# EAGLE board Sequencer-Memory-V1.0-1 (EAGLE 7.6.0)
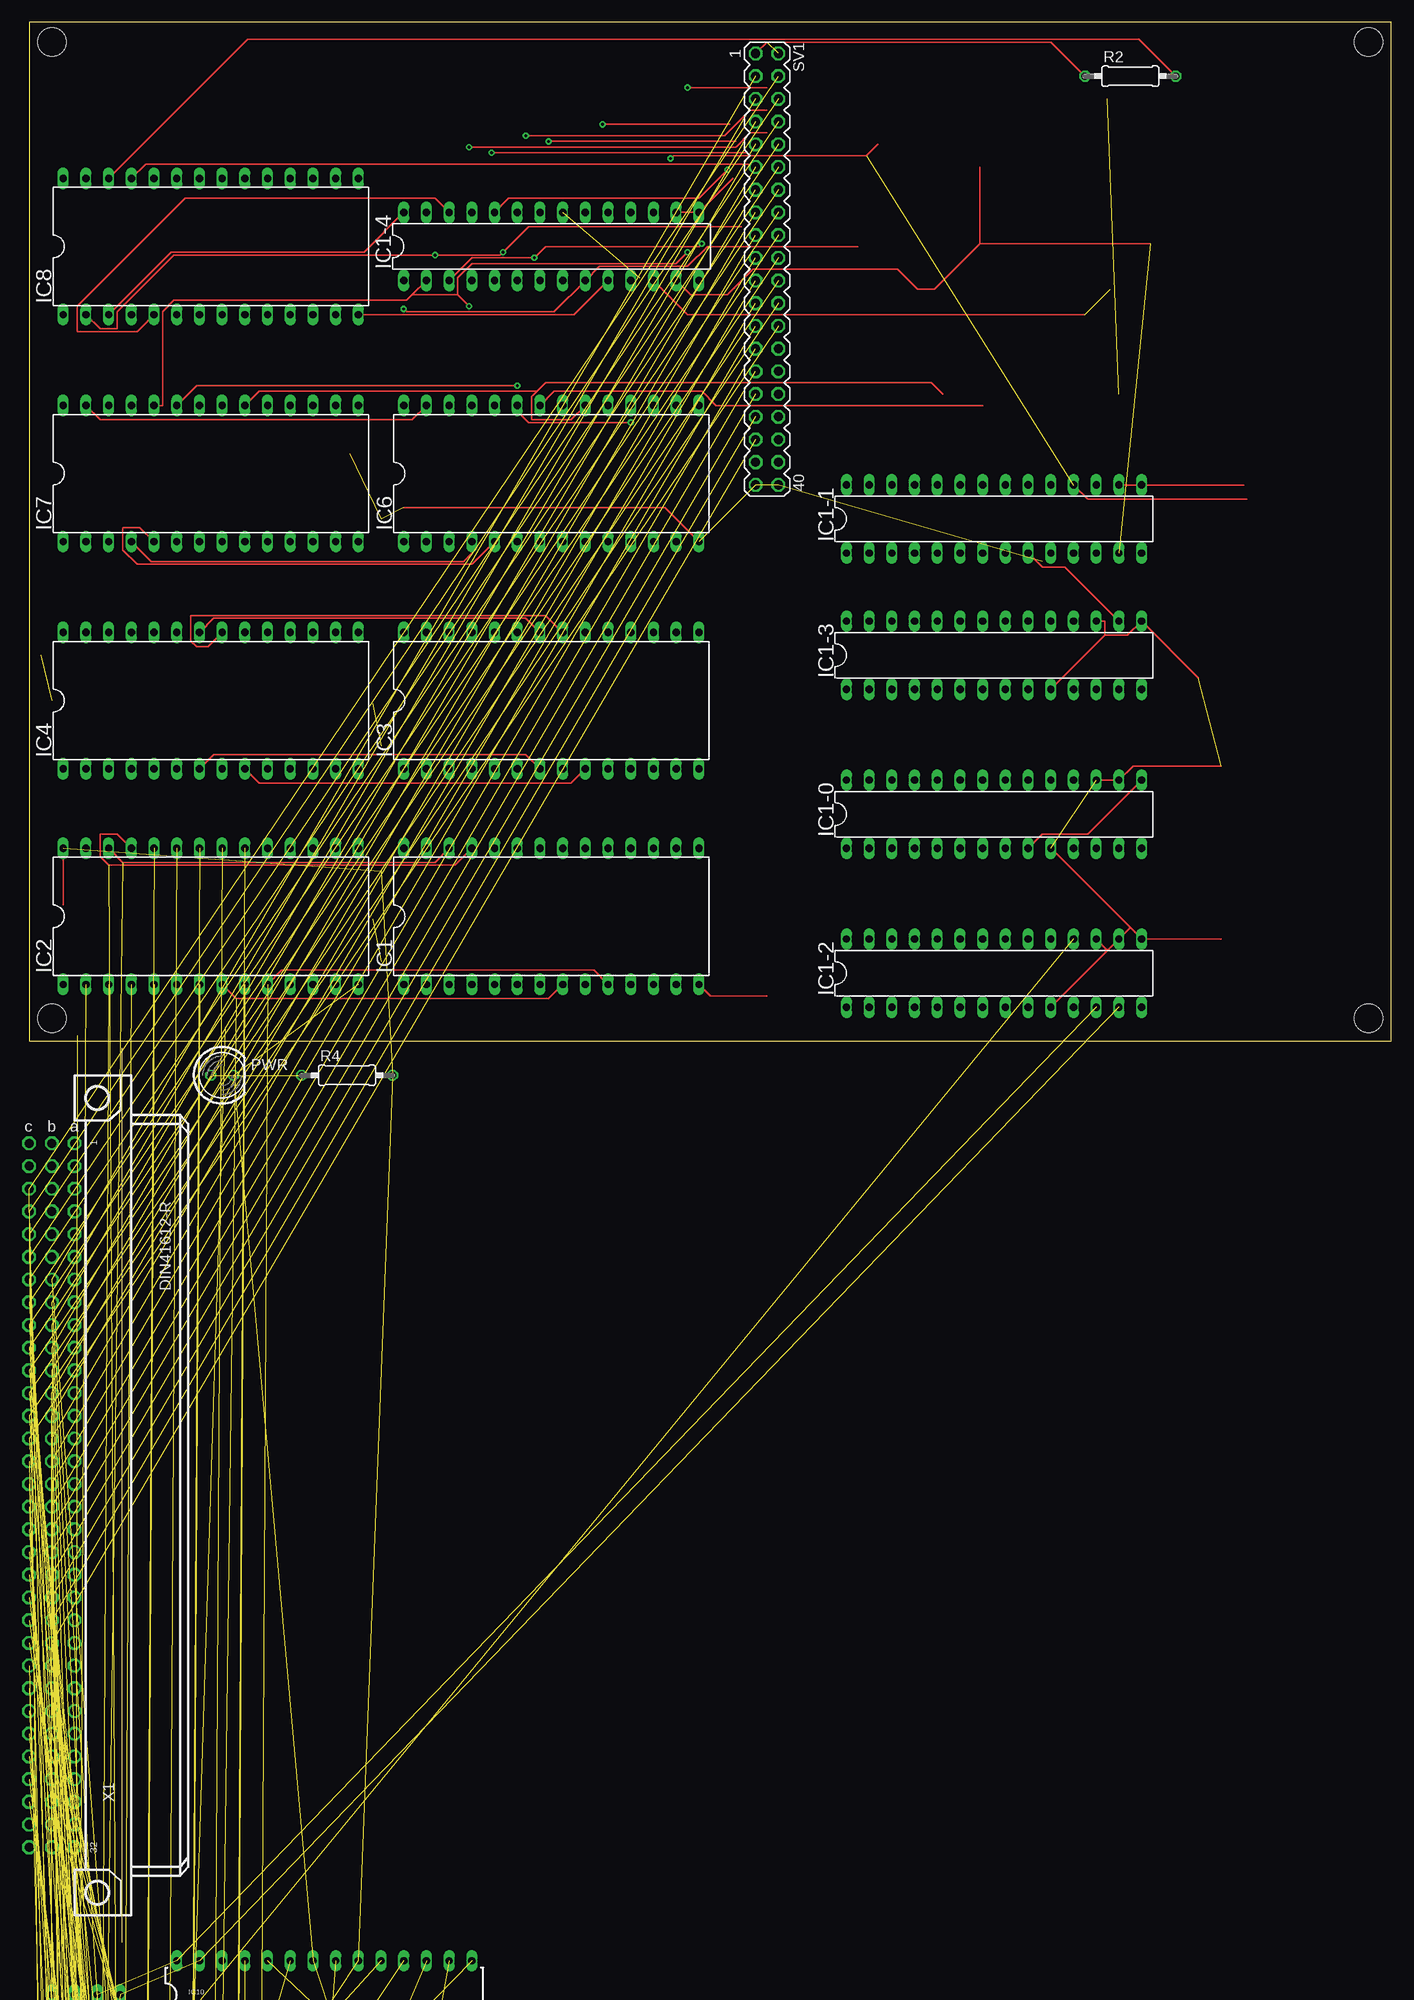
[diagram p0: board, top side]
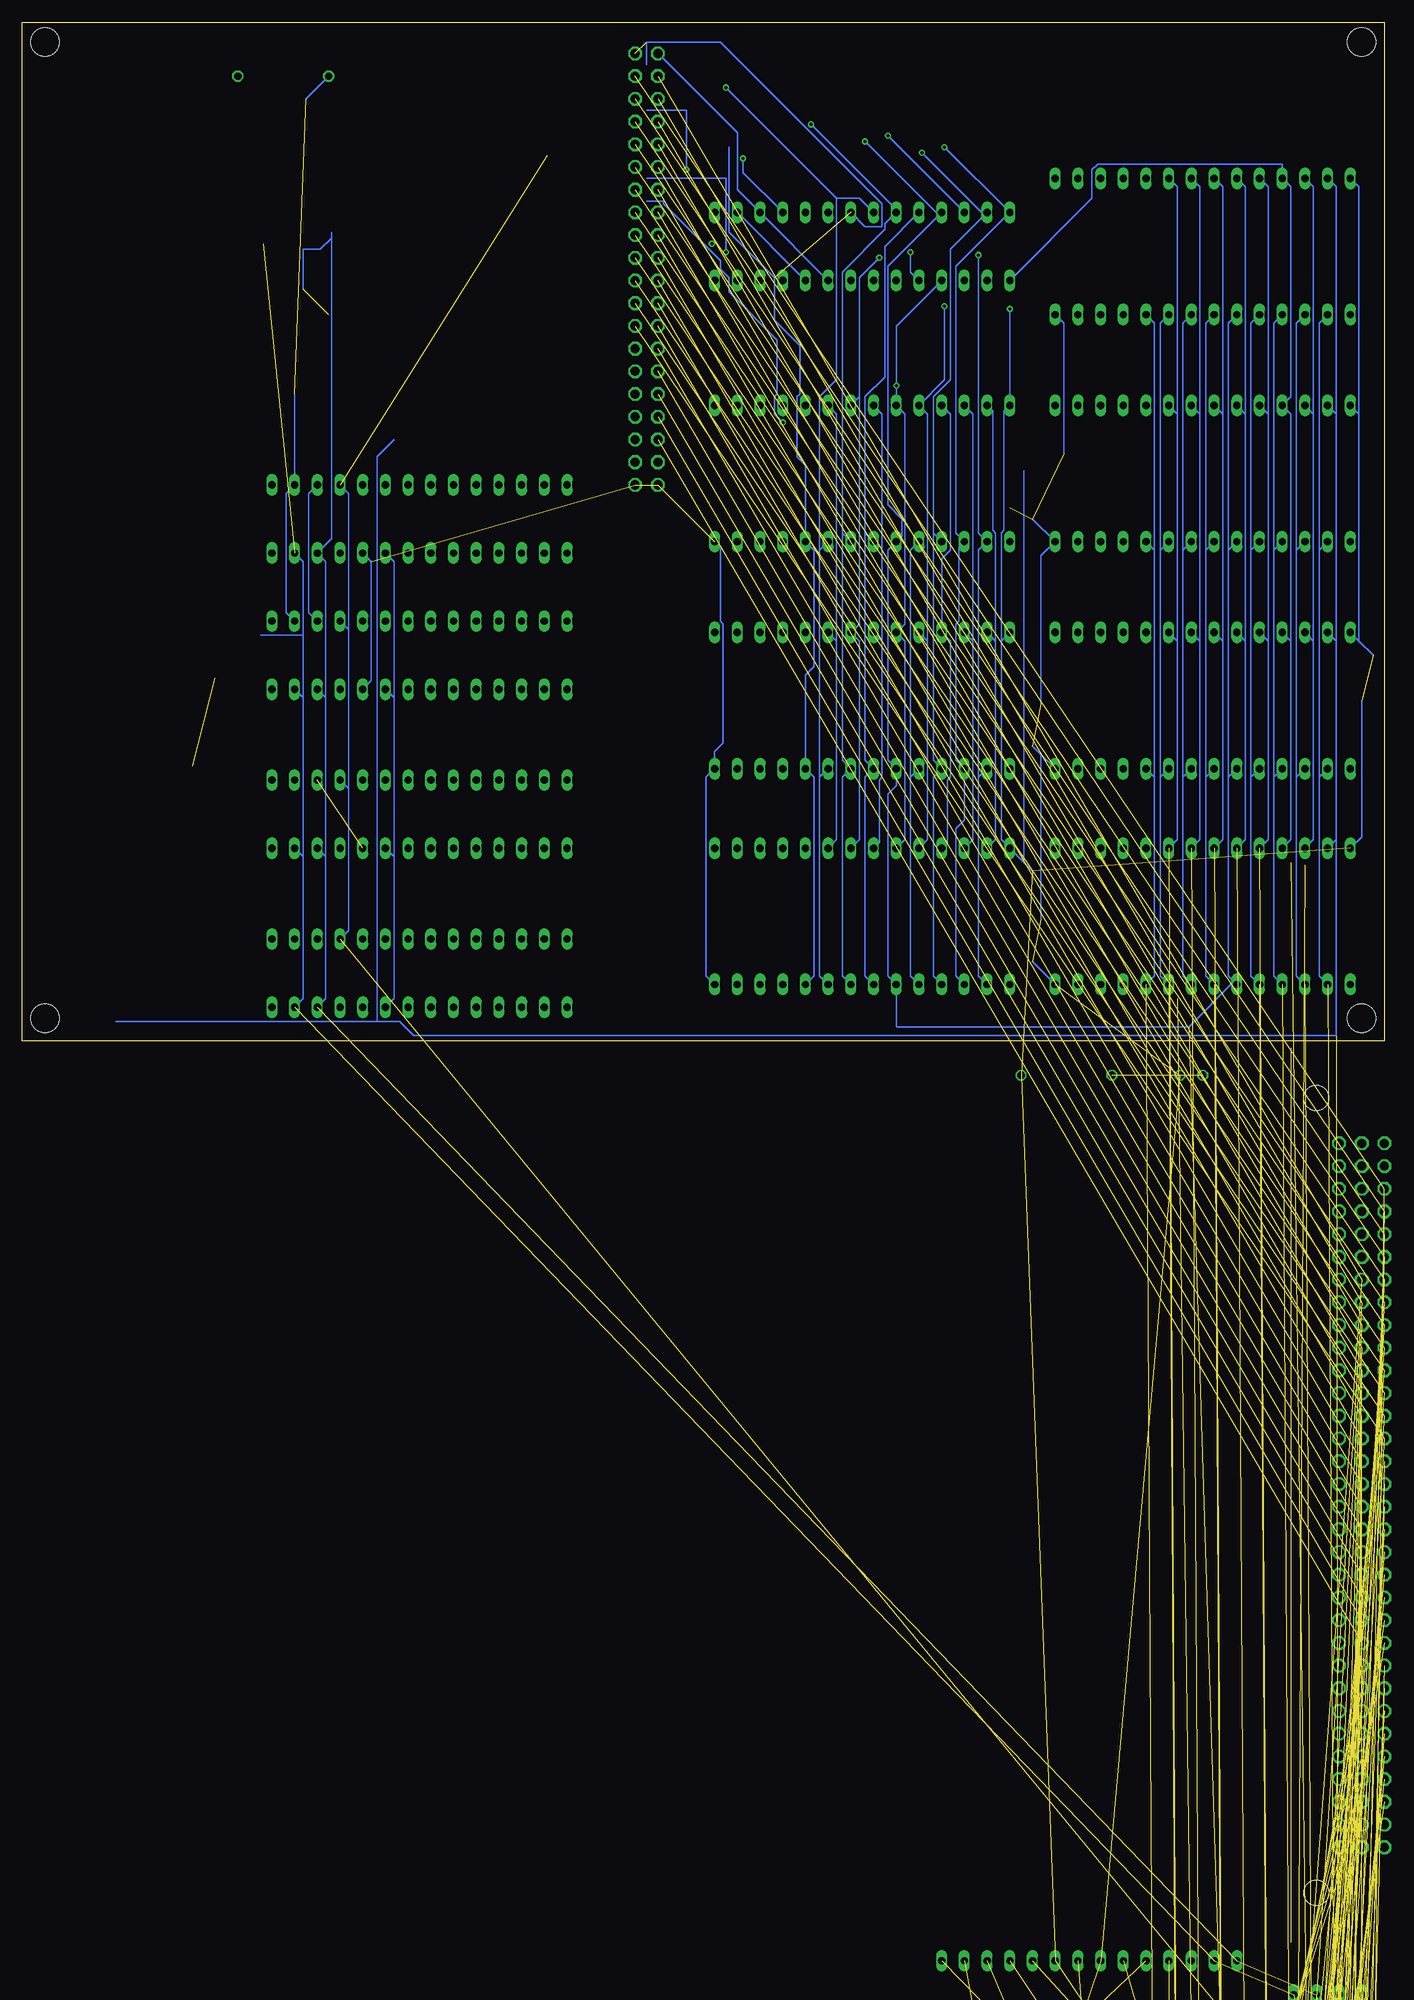
[diagram p1: board, bottom side, seen from below]

Size 152.38 x 113.97 mm. Coordinates in mm from the lower left corner, seen from the top.
Outline: 0,0 152.38,0 152.38,113.97 0,113.97 0,0
Copper layers (1*16): Top 0.0356mm / dielectric 1.5011mm / Bottom 0.0356mm
Design rules "LaenPCBOrder": minimum track width 6mil, minimum drill 13mil, track to track 6mil, track to pad 6mil, pad to pad 6mil, via to via 6mil, smd to smd 6mil, copper to edge 15mil, drill to drill 6mil, minimum pad ring 7mil, minimum via ring 7mil, stop-mask expansion 3mil, vias tented up to drill 0mil, thermal gap 10mil
Holes 3.2 mm at 2.54,2.54 149.86,2.54 149.86,111.76 2.54,111.76

## Footprints (pad centres in the part's own frame; a part is rotated, then mirrored left to right if it is on the bottom)
TACTILE-PTH-SIDEEZ = drill 0.8 pad 1.7: 1 -2.5,0; 2 2.5,0 | drill 1.2 pad 2.2: ANCHOR1 -3.5,2.5; ANCHOR2 3.5,2.5
C025-024X044 = drill 0.813 pad 1.422 octagon: 1 -1.27,0; 2 1.27,0
SW4-6.2X6.2X5.0MM = drill 1.143 pad 1.905 square: 1 -3.25,2.25 | drill 1.143 pad 1.905: 2 -3.25,-2.25; 3 3.25,-2.25; 4 3.25,2.25
JP1 = drill 0.914 long: 1 0,-1.27; 2 0,1.27
DIL28-6 = drill 0.813 long: 1 -16.51,-7.62; 2 -13.97,-7.62; 3 -11.43,-7.62; 4 -8.89,-7.62; 5 -6.35,-7.62; 6 -3.81,-7.62; 7 -1.27,-7.62; 8 1.27,-7.62; 9 3.81,-7.62; 10 6.35,-7.62; 11 8.89,-7.62; 12 11.43,-7.62; 13 13.97,-7.62; 14 16.51,-7.62; 15 16.51,7.62; 16 13.97,7.62; 17 11.43,7.62; 18 8.89,7.62; 19 6.35,7.62; 20 3.81,7.62; 21 1.27,7.62; 22 -1.27,7.62; 23 -3.81,7.62; 24 -6.35,7.62; 25 -8.89,7.62; 26 -11.43,7.62; 27 -13.97,7.62; 28 -16.51,7.62
DIL28-3 = drill 0.813 long: 1 -16.51,-3.81; 2 -13.97,-3.81; 3 -11.43,-3.81; 4 -8.89,-3.81; 5 -6.35,-3.81; 6 -3.81,-3.81; 7 -1.27,-3.81; 8 1.27,-3.81; 9 3.81,-3.81; 10 6.35,-3.81; 11 8.89,-3.81; 12 11.43,-3.81; 13 13.97,-3.81; 14 16.51,-3.81; 15 16.51,3.81; 16 13.97,3.81; 17 11.43,3.81; 18 8.89,3.81; 19 6.35,3.81; 20 3.81,3.81; 21 1.27,3.81; 22 -1.27,3.81; 23 -3.81,3.81; 24 -6.35,3.81; 25 -8.89,3.81; 26 -11.43,3.81; 27 -13.97,3.81; 28 -16.51,3.81
DIL8 = drill 0.813 long: 1 -3.81,-3.81; 2 -1.27,-3.81; 3 1.27,-3.81; 4 3.81,-3.81; 5 3.81,3.81; 6 1.27,3.81; 7 -1.27,3.81; 8 -3.81,3.81
FTDI_DEVICE_SIDE = drill 1 square: P$1 -6.35,0 | drill 1.016 pad 1.778: P$2 -3.81,0; P$3 -1.27,0; P$4 1.27,0; P$5 3.81,0; P$6 6.35,0
1X03 = drill 1.016 long: 1 -2.54,0; 2 0,0; 3 2.54,0
LED5MM = drill 0.813 octagon: A -1.27,0; K 1.27,0
HC49/S = drill 0.813: 1 -2.413,0; 2 2.413,0
0207/10 = drill 0.813 octagon: 1 -5.08,0; 2 5.08,0
0207/10' = drill 0.813 pad 1.676 octagon: 1 -5.08,0; 2 5.08,0
9070-1W = drill 0.813 long: 1 5.08,-2.54; 2 5.08,0; 3 5.08,2.54 | drill 1.118 pad 1.778: B 0,-2.54; B1 0,2.54
MA20-2 = drill 1.016 octagon: 1 -24.13,-1.27; 2 -24.13,1.27; 3 -21.59,-1.27; 4 -21.59,1.27; 5 -19.05,-1.27; 6 -19.05,1.27; 7 -16.51,-1.27; 8 -16.51,1.27; 9 -13.97,-1.27; 10 -13.97,1.27; 11 -11.43,-1.27; 12 -11.43,1.27; 13 -8.89,-1.27; 14 -8.89,1.27; 15 -6.35,-1.27; 16 -6.35,1.27; 17 -3.81,-1.27; 18 -3.81,1.27; 19 -1.27,-1.27; 20 -1.27,1.27; 21 1.27,-1.27; 22 1.27,1.27; 23 3.81,-1.27; 24 3.81,1.27; 25 6.35,-1.27; 26 6.35,1.27; 27 8.89,-1.27; 28 8.89,1.27; 29 11.43,-1.27; 30 11.43,1.27; 31 13.97,-1.27; 32 13.97,1.27; 33 16.51,-1.27; 34 16.51,1.27; 35 19.05,-1.27; 36 19.05,1.27; 37 21.59,-1.27; 38 21.59,1.27; 39 24.13,-1.27; 40 24.13,1.27
FABC96R = drill 1.016 octagon: A1 -2.54,39.37; A2 -2.54,36.83; A3 -2.54,34.29; A4 -2.54,31.75; A5 -2.54,29.21; A6 -2.54,26.67; A7 -2.54,24.13; A8 -2.54,21.59; A9 -2.54,19.05; A10 -2.54,16.51; A11 -2.54,13.97; A12 -2.54,11.43; A13 -2.54,8.89; A14 -2.54,6.35; A15 -2.54,3.81; A16 -2.54,1.27; A17 -2.54,-1.27; A18 -2.54,-3.81; A19 -2.54,-6.35; A20 -2.54,-8.89; A21 -2.54,-11.43; A22 -2.54,-13.97; A23 -2.54,-16.51; A24 -2.54,-19.05; A25 -2.54,-21.59; A26 -2.54,-24.13; A27 -2.54,-26.67; A28 -2.54,-29.21; A29 -2.54,-31.75; A30 -2.54,-34.29; A31 -2.54,-36.83; A32 -2.54,-39.37; B1 -5.08,39.37; B2 -5.08,36.83; B3 -5.08,34.29; B4 -5.08,31.75; B5 -5.08,29.21; B6 -5.08,26.67; B7 -5.08,24.13; B8 -5.08,21.59; B9 -5.08,19.05; B10 -5.08,16.51; B11 -5.08,13.97; B12 -5.08,11.43; B13 -5.08,8.89; B14 -5.08,6.35; B15 -5.08,3.81; B16 -5.08,1.27; B17 -5.08,-1.27; B18 -5.08,-3.81; B19 -5.08,-6.35; B20 -5.08,-8.89; B21 -5.08,-11.43; B22 -5.08,-13.97; B23 -5.08,-16.51; B24 -5.08,-19.05; B25 -5.08,-21.59; B26 -5.08,-24.13; B27 -5.08,-26.67; B28 -5.08,-29.21; B29 -5.08,-31.75; B30 -5.08,-34.29; B31 -5.08,-36.83; B32 -5.08,-39.37; C1 -7.62,39.37; C2 -7.62,36.83; C3 -7.62,34.29; C4 -7.62,31.75; C5 -7.62,29.21; C6 -7.62,26.67; C7 -7.62,24.13; C8 -7.62,21.59; C9 -7.62,19.05; C10 -7.62,16.51; C11 -7.62,13.97; C12 -7.62,11.43; C13 -7.62,8.89; C14 -7.62,6.35; C15 -7.62,3.81; C16 -7.62,1.27; C17 -7.62,-1.27; C18 -7.62,-3.81; C19 -7.62,-6.35; C20 -7.62,-8.89; C21 -7.62,-11.43; C22 -7.62,-13.97; C23 -7.62,-16.51; C24 -7.62,-19.05; C25 -7.62,-21.59; C26 -7.62,-24.13; C27 -7.62,-26.67; C28 -7.62,-29.21; C29 -7.62,-31.75; C30 -7.62,-34.29; C31 -7.62,-36.83; C32 -7.62,-39.37 | hole 2.794: 0,-44.456; 0,44.456

## Placement (x,y rotation side)
BUS-RESET  SWITCH-MOMENTARY-2SIDE_EZ  [TACTILE-PTH-SIDEEZ]  26.67,-134.62 0 top  (outside the outline)
C11  20pf  [C025-024X044]  13.97,-152.4 0 top  (outside the outline)
C12  20pf  [C025-024X044]  19.05,-152.4 0 top  (outside the outline)
C13  0.1  [C025-024X044]  24.13,-152.4 0 top  (outside the outline)
C14  0.1  [C025-024X044]  29.21,-152.4 0 top  (outside the outline)
C15  0.1  [C025-024X044]  34.29,-152.4 0 top  (outside the outline)
C16  0.1  [C025-024X044]  39.37,-152.4 0 top  (outside the outline)
C17  0.1  [C025-024X044]  44.45,-152.4 0 top  (outside the outline)
C18  0.1  [C025-024X044]  49.53,-152.4 0 top  (outside the outline)
C19  0.1  [C025-024X044]  1.27,-160.02 0 top  (outside the outline)
C20  0.1  [C025-024X044]  6.35,-160.02 0 top  (outside the outline)
C21  0.1  [C025-024X044]  11.43,-160.02 0 top  (outside the outline)
C22  0.1  [C025-024X044]  16.51,-160.02 0 top  (outside the outline)
C23  0.1  [C025-024X044]  21.59,-160.02 0 top  (outside the outline)
CPU-RESET  TS-1109-7  [SW4-6.2X6.2X5.0MM]  8.89,-134.62 0 top  (outside the outline)
DTR-RESET  [JP1]  2.54,-138.43 0 top  (outside the outline)
FTDI-VCC  [JP1]  19.05,-135.89 0 top  (outside the outline)
IC1  [DIL28-6]  58.42,13.97 0 top
IC1-0  MCP23017SP  [DIL28-3]  107.95,25.4 0 top
IC1-1  MCP23017SP  [DIL28-3]  107.95,58.42 0 top
IC1-2  MCP23017SP  [DIL28-3]  107.95,7.62 0 top
IC1-3  MCP23017SP  [DIL28-3]  107.95,43.18 0 top
IC1-4  MCP23017SP  [DIL28-3]  58.42,88.9 0 top
IC1-5  MCP23017SP  [DIL28-3]  19.05,-289.56 0 top  (outside the outline)
IC2  [DIL28-6]  20.32,13.97 0 top
IC3  [DIL28-6]  58.42,38.1 0 top
IC4  [DIL28-6]  20.32,38.1 0 top
IC5  [DIL28-6]  19.05,-201.93 0 top  (outside the outline)
IC6  [DIL28-6]  58.42,63.5 0 top
IC7  [DIL28-6]  20.32,63.5 0 top
IC8  [DIL28-6]  20.32,88.9 0 top
IC9  24AA01P  [DIL8]  6.35,-110.49 0 top  (outside the outline)
IC10  ATMEGA328P_PDIP  [DIL28-3]  33.02,-106.68 0 top  (outside the outline)
IC11  MCP23017SP  [DIL28-3]  19.05,-228.6 0 top  (outside the outline)
IC12  MCP23017SP  [DIL28-3]  19.05,-241.3 0 top  (outside the outline)
IC13  MCP23017SP  [DIL28-3]  19.05,-254 0 top  (outside the outline)
IC14  MCP23017SP  [DIL28-3]  19.05,-266.7 0 top  (outside the outline)
JP3  FTDI_DEVICE  [FTDI_DEVICE_SIDE]  43.18,-158.75 0 top  (outside the outline)
JP4  [1X03]  29.21,-160.02 0 top  (outside the outline)
LED1  [LED5MM]  2.54,-144.78 0 top  (outside the outline)
LED2  [LED5MM]  15.24,-144.78 0 top  (outside the outline)
LED3  [LED5MM]  27.94,-144.78 0 top  (outside the outline)
LED4  [LED5MM]  40.64,-144.78 0 top  (outside the outline)
LED5  [LED5MM]  2.54,-152.4 0 top  (outside the outline)
PWR  [LED5MM]  21.59,-3.81 0 top  (outside the outline)
PWR1  [LED5MM]  2.54,-182.88 0 top  (outside the outline)
Q1  16Mhz  [HC49/S]  41.91,-133.35 0 top  (outside the outline)
R1  330  [0207/10]  5.08,-190.5 0 top  (outside the outline)
R2  10k  [0207/10]  123.19,107.95 0 top
R3  10k  [0207/10']  5.08,-276.86 0 top  (outside the outline)
R4  330  [0207/10]  35.56,-3.81 0 top  (outside the outline)
R5  2.2k  [0207/10]  5.08,-167.64 0 top  (outside the outline)
R6  330  [0207/10]  17.78,-167.64 0 top  (outside the outline)
R7  10k  [0207/10']  17.78,-276.86 0 top  (outside the outline)
R8  10k  [0207/10]  30.48,-167.64 0 top  (outside the outline)
R9  10k  [0207/10']  30.48,-276.86 0 top  (outside the outline)
R10  10k  [0207/10']  5.08,-281.94 0 top  (outside the outline)
R11  330  [0207/10]  43.18,-167.64 0 top  (outside the outline)
R12  2.2k  [0207/10]  5.08,-172.72 0 top  (outside the outline)
R16  330  [0207/10]  17.78,-172.72 0 top  (outside the outline)
R17  330  [0207/10]  30.48,-172.72 0 top  (outside the outline)
R18  330  [0207/10]  43.18,-172.72 0 top  (outside the outline)
R25  10k  [0207/10]  5.08,-177.8 0 top  (outside the outline)
S-A  [9070-1W]  17.78,-124.46 0 top  (outside the outline)
S-B  [9070-1W]  44.45,-124.46 0 top  (outside the outline)
SV1  [MA20-2]  82.55,86.36 270 top
SV2  [MA20-2]  25.4,-217.17 0 top  (outside the outline)
X1  FABC96R  [FABC96R]  7.62,-50.8 0 top  (outside the outline)

## Library data of the parts
BUS-RESET = SparkFun-Electromechanical
C11-C23 R3 R7 R9 R10 = adafruit
CPU-RESET = Seeed-OPL-Switch; MPN: TS-1109-7
DTR-RESET FTDI-VCC = jumper
IC1-IC8 = memory-hitachi; OC_FARNELL: 283605; OC_NEWARK: unknown
IC1-0 IC1-1-IC1-5 IC11-IC14 = microchip; MF: MICROCHIP; MPN: MCP23017-E/SP; OC_FARNELL: 1332088; OC_NEWARK: 31K2959
IC9 = microchip; MPN: 24AA01-I/P; OC_FARNELL: 1331266; OC_NEWARK: 35M0692
IC10 = SparkFun-DigitalIC
JP3 = SparkFun-Connectors
JP4 = pinhead
LED1-LED5 PWR PWR1 = led
Q1 = crystal; OC_FARNELL: 1667008; OC_NEWARK: unknown
R1 R4 = eagle-ltspice; SPICEMODEL: NONE; SPICEPREFIX: R
R2 R5 R6 R8 R11 R12 R16-R18 R25 = resistor
S-A S-B = switch
SV1 SV2 = con-lstb; OC_FARNELL: unknown; OC_NEWARK: unknown
X1 = con-vg

## Nets
-CMEMRD: IC1.22 IC2.22 IC3.22 IC4.22 IC5.22 IC6.22 IC7.22 IC8.22
-CMEMSEL: IC1.20 IC2.20 IC3.20 IC4.20 IC5.20 IC6.20 IC7.20 IC8.20
-CMEMWR: IC1.27 IC2.27 IC3.27 IC4.27 IC5.27 IC6.27 IC7.27 IC8.27
-RESET: C13.2 CPU-RESET.3 IC1-0.18 IC1-1.18 IC1-2.18 IC1-3.18 IC1-4.18 IC1-5.18 IC10.1 IC11.18 IC12.18 IC13.18 IC14.18 R3.1 R7.1 R8.2 R9.1 R10.1
AC-LD: IC12.3 SV2.15 X1.C21
AC-LD-INV: IC12.2 SV2.13 X1.C20
AC-RD: IC12.4 SV2.17 X1.C22
ADDR-REG-ID0: IC14.22 SV1.5 X1.B8
ADDR-REG-ID1: IC14.23 SV1.7 X1.B9
ADDR-REG-LD: IC14.24 SV1.9 X1.B10
ADDR-REG-RD: IC14.25 SV1.11 X1.B11
ALU0: IC12.26 SV2.5 X1.C16
ALU1: IC12.27 SV2.7 X1.C17
ALU2: IC12.28 SV2.9 X1.C18
ALU3: IC12.1 SV2.11 X1.C19
ALU-FUNC: IC12.25 SV2.3 X1.C15
ARD-RXIN: IC10.2 JP3.P$3
ARD-TXOUT: IC10.3 JP3.P$2
BIT0: IC11.1
BIT1: IC11.2
BIT2: IC11.3
BIT3: IC11.4
BIT4: IC11.5
BIT5: IC11.6
BIT6: IC11.7
BIT7: IC11.8
BR-COND: IC12.6 SV2.4 X1.C24
CADDR0: IC1-4.21 IC1-5.21 IC1.10 IC2.10 IC3.10 IC4.10 IC5.10 IC6.10 IC7.10 IC8.10
CADDR1: IC1-4.22 IC1-5.22 IC1.9 IC2.9 IC3.9 IC4.9 IC5.9 IC6.9 IC7.9 IC8.9
CADDR2: IC1-4.23 IC1-5.23 IC1.8 IC2.8 IC3.8 IC4.8 IC5.8 IC6.8 IC7.8 IC8.8
CADDR3: IC1-4.24 IC1-5.24 IC1.7 IC2.7 IC3.7 IC4.7 IC5.7 IC6.7 IC7.7 IC8.7
CADDR4: IC1-4.25 IC1-5.25 IC1.6 IC2.6 IC3.6 IC4.6 IC5.6 IC6.6 IC7.6 IC8.6
CADDR5: IC1-4.26 IC1-5.26 IC1.5 IC2.5 IC3.5 IC4.5 IC5.5 IC6.5 IC7.5 IC8.5
CADDR6: IC1-4.27 IC1-5.27 IC1.4 IC2.4 IC3.4 IC4.4 IC5.4 IC6.4 IC7.4 IC8.4
CADDR7: IC1-4.28 IC1-5.28 IC1.3 IC2.3 IC3.3 IC4.3 IC5.3 IC6.3 IC7.3 IC8.3
CADDR8: IC1-4.1 IC1-5.1 IC1.25 IC2.25 IC3.25 IC4.25 IC5.25 IC6.25 IC7.25 IC8.25
CADDR9: IC1-4.2 IC1-5.2 IC1.24 IC2.24 IC3.24 IC4.24 IC5.24 IC6.24 IC7.24 IC8.24
CADDR10: IC1-4.3 IC1-5.3 IC1.21 IC2.21 IC3.21 IC4.21 IC5.21 IC6.21 IC7.21 IC8.21
CADDR11: IC1-4.4 IC1-5.4 IC1.23 IC2.23 IC3.23 IC4.23 IC5.23 IC6.23 IC7.23 IC8.23
CADDR12: IC1-4.5 IC1-5.5 IC1.2 IC2.2 IC3.2 IC4.2 IC5.2 IC6.2 IC7.2 IC8.2
CMEMSEL: IC1.26 IC2.26 IC3.26 IC4.26 IC5.26 IC6.26 IC7.26 IC8.26 R2.2
GND: BUS-RESET.2 C11.1 C12.1 C14.1 C15.1 C16.1 C17.1 C18.1 C19.1 C20.1 C21.1 C22.1 C23.1 CPU-RESET.1 IC1-0.10 IC1-0.16 IC1-0.17 IC1-1.10 IC1-1.17 IC1-2.10 IC1-2.15 IC1-2.16 IC1-2.17 IC1-3.10 IC1-3.15 IC1-3.17 IC1-4.10 IC1-4.15 IC1-4.16 IC1-5.10 IC1-5.15 IC1-5.16 IC1.14 IC2.14 IC3.14 IC4.14 IC5.14 IC6.14 IC7.14 IC8.14 IC9.4 IC10.8 IC10.22 IC11.10 IC11.16 IC12.10 IC12.15 IC12.16 IC13.10 IC13.17 IC14.10 IC14.15 IC14.17 JP3.P$5 JP3.P$6 JP4.1 PWR1.K PWR.K R6.2 R11.2 R16.2 R17.2 R18.2 S-A.3 S-B.3 SV1.39 SV1.40 SV2.39 SV2.40
H/L-SWAP: IC12.7 SV2.6 X1.C25
I/D-REG-DN: IC13.3 SV1.8 X1.C5
I/D-REG-LD: IC13.1 SV1.4 X1.C3
I/D-REG-RD: IC13.2 SV1.6 X1.C4
I/D-REG-UP: IC13.4 SV1.10 X1.C6
I/O-ADDR: IC13.26 SV2.31 X1.B28
I/O-RD: IC13.25 SV2.29 X1.B27
I/O-WR: IC13.24 SV2.27 X1.B26
IN: IC12.8 SV2.8 X1.C26
IN-SWITCH: IC11.26
INT: IC13.27 SV2.33 X1.B29
INTA: IC13.28 SV2.35 X1.B30
LEDS-LD: IC11.27
MEM-RD: IC13.23 SV2.25 X1.B25
MEM-WR: IC13.22 SV2.23 X1.B24
N$1: PWR1.A R1.1
N$6: C11.2 IC10.9 Q1.2
N$7: C12.2 IC10.10 Q1.1
N$8: C13.1 DTR-RESET.2
N$10: PWR.A R4.1
N$17: C14.2 IC10.21
N$20: IC10.19 LED1.A
N$21: IC10.18 LED2.A
N$22: IC10.17 LED3.A
N$23: IC10.16 LED4.A
N$24: IC10.15 LED5.A
N$25: LED2.K R11.1
N$26: LED1.K R16.1
N$27: LED3.K R6.1
N$28: LED4.K R17.1
N$29: LED5.K R18.1
N$30: IC10.23 S-A.2
N$31: IC10.24 S-B.2
N$32: IC9.7 JP4.2
N$33: DTR-RESET.1 JP3.P$1
N$34: FTDI-VCC.2 JP3.P$4
N$39: BUS-RESET.1 IC10.25 R25.1
OUT: IC11.21 SV2.10 X1.C27
OUT-LED: IC11.25
REG-BRD-LD-ID0: IC14.2 SV1.21 X1.B16
REG-BRD-LD-ID1: IC14.3 SV1.23 X1.B17
REG-BRD-RD-ID0: IC14.26 SV1.13 X1.B12
REG-BRD-RD-ID1: IC14.27 SV1.15 X1.B13
REG-FUNC: IC14.21 SV1.3 X1.B7
REG-LD-HI: IC13.21 SV1.35 X1.B23
REG-LD-ID0: IC14.4 SV1.25 X1.B18
REG-LD-ID1: IC14.5 SV1.27 X1.B19
REG-LD-LO: IC14.7 SV1.31 X1.B21
REG-RD-HI: IC14.8 SV1.33 X1.B22
REG-RD-ID0: IC14.28 SV1.17 X1.B14
REG-RD-ID1: IC14.1 SV1.19 X1.B15
REG-RD-LO: IC14.6 SV1.29 X1.B20
RESET: IC11.24 SV2.16 X1.C30
SCL: IC1-0.12 IC1-1.12 IC1-2.12 IC1-3.12 IC1-4.12 IC1-5.12 IC9.6 IC10.28 IC11.12 IC12.12 IC13.12 IC14.12 R5.1
SDA: IC1-0.13 IC1-1.13 IC1-2.13 IC1-3.13 IC1-4.13 IC1-5.13 IC9.5 IC10.27 IC11.13 IC12.13 IC13.13 IC14.13 R12.1
SP/PC-ADDR-RD: IC13.8 SV1.18 X1.C10
SP/PC-DATA-RD-HI: IC13.7 SV1.16 X1.C9
SP/PC-DATA-RD-LO: IC13.6 SV1.14 X1.C8
SP/PC-DN: IC12.23 SV1.24 X1.C13
SP/PC-LD-HI: IC12.22 SV1.22 X1.C12
SP/PC-LD-LO: IC12.21 SV1.20 X1.C11
SP/PC-SEL: IC13.5 SV1.12 X1.C7
SP/PC-UP: IC12.24 SV1.26 X1.C14
SR-LD: IC12.5 SV2.19 X1.C23
SWITCHES-RD: IC11.28
UNUSED1: IC11.22 SV2.12 X1.C28
UNUSED2: IC11.23 SV2.14 X1.C29
VCC: C15.2 C16.2 C17.2 C18.2 C19.2 C20.2 C21.2 C22.2 C23.2 FTDI-VCC.1 IC1-0.9 IC1-0.15 IC1-1.9 IC1-1.15 IC1-1.16 IC1-2.9 IC1-3.9 IC1-3.16 IC1-4.9 IC1-4.17 IC1-5.9 IC1-5.17 IC1.28 IC2.28 IC3.28 IC4.28 IC5.28 IC6.28 IC7.28 IC8.28 IC9.1 IC9.2 IC9.3 IC9.8 IC10.7 IC10.20 IC11.9 IC11.15 IC11.17 IC12.9 IC12.17 IC13.9 IC13.15 IC13.16 IC14.9 IC14.16 JP4.3 R1.2 R2.1 R3.2 R4.2 R5.2 R7.2 R8.1 R9.2 R10.2 R12.2 R25.2 S-A.1 S-B.1 SV1.1 SV1.2 SV2.1 SV2.2

## Tracks (layer width: path | path; a pad name or v marks a point on that pad's centre or on a via)
-CMEMRD  (1 unrouted)
  Top 0.152: 106.68,71.12 76.83,71.12 75.25,72.71 58.74,72.71 IC6.22 | IC4.22 20.64,47.31 55.56,47.31 IC3.22
  Bottom 0.152: IC2.22 18.1,22.54 18.1,44.77 | IC4.22 18.1,44.77 | 18.1,70.17 IC7.22 | 18.1,44.77 18.1,70.17 | IC8.22 18.1,95.57 18.1,70.17 | IC1.22 56.52,22.23 56.52,29.21 56.2,29.53 56.2,44.77 | IC3.22 56.2,44.77 | IC6.22 56.2,70.17 56.2,44.77
-CMEMSEL  (1 unrouted)
  Top 0.152: 102.23,72.39 100.97,73.66 57.78,73.66 56.83,72.71 | 56.83,72.71 56.2,72.07 56.2,69.53 60.64,69.53 IC6.20 | IC7.20 25.72,72.71 56.83,72.71
  Bottom 0.152: IC2.20 23.18,22.54 23.18,44.77 | IC4.20 23.18,44.77 | 23.18,70.17 IC7.20 | 23.18,44.77 23.18,70.17 | IC8.20 23.18,95.57 23.18,70.17 | IC1.20 61.28,22.54 61.28,44.77 | IC3.20 61.28,44.77 | IC6.20 61.28,70.17 61.28,44.77
-CMEMWR  (1 unrouted)
  Top 0.152: IC6.27 42.86,69.53 7.94,69.53 IC7.27
  Bottom 0.152: 112.71,2.22 141.92,2.22 | 112.71,2.22 112.71,65.41 110.81,67.31 | IC1.27 43.5,22.54 43.5,44.77 | IC3.27 43.5,44.77 | IC6.27 43.81,70.48 43.81,57.15 43.5,56.83 43.5,44.77 | 5.4,22.54 IC2.27 | 5.4,44.77 5.4,22.54 | IC4.27 5.4,44.77 | 5.4,70.17 IC7.27 | 5.4,44.77 5.4,70.17 | IC8.27 5.4,95.57 5.4,70.17 | 112.71,2.22 110.17,2.22 108.58,0.64 5.4,0.64 5.4,22.54
-RESET  (via drill 0.33)  (14 unrouted)
  Top 0.152: v71.75,98.74 72.07,99.06 93.66,99.06 94.93,100.33 | 136.21,60.64 118.43,60.64 IC1-1.18
  Bottom 0.152: IC1-4.18 71.75,97.16 v71.75,98.74 | IC1-2.18 115.89,12.38 115.89,28.26 | IC1-0.18 115.89,28.26 | 115.89,46.04 IC1-3.18 | 115.89,28.26 115.89,46.04 | IC1-1.18 115.89,61.28 115.89,46.04
AC-LD  (2 unrouted)
AC-LD-INV  (2 unrouted)
AC-RD  (2 unrouted)
ADDR-REG-ID0  (2 unrouted)
ADDR-REG-ID1  (2 unrouted)
ADDR-REG-LD  (2 unrouted)
ADDR-REG-RD  (2 unrouted)
ALU0  (2 unrouted)
ALU1  (2 unrouted)
ALU2  (2 unrouted)
ALU3  (2 unrouted)
ALU-FUNC  (2 unrouted)
ARD-RXIN  (1 unrouted)
ARD-TXOUT  (1 unrouted)
BR-COND  (2 unrouted)
CADDR0  (3 unrouted)
  Top 0.152: IC2.10 28.26,7.94 63.18,7.94 IC1.10
  Bottom 0.152: IC2.10 25.72,7.3 25.72,29.53 | IC4.10 25.72,29.53 | 25.72,54.93 IC7.10 | 25.72,29.53 25.72,54.93 | IC8.10 25.72,80.33 25.72,54.93 | IC1-4.21 58.1,91.12 56.2,91.12 56.2,93.66 74.3,111.76 82.55,111.76 82.55,109.22 | IC1.10 63.82,7.3 63.82,29.53 IC3.10 64.77,40.96 63.82,41.91 63.82,54.93 IC6.10 64.77,64.45 65.72,65.41 65.72,72.07 65.41,72.39 65.41,77.79 68.26,80.64 68.26,85.41 73.34,90.49 73.34,100.01
CADDR1  (via drill 0.33)  (2 unrouted)
  Top 0.152: v73.66,106.68 82.55,106.68 | IC4.9 25.72,28.89 60.64,28.89 IC3.9
  Bottom 0.152: IC2.9 25.08,7.3 25.08,29.53 | IC4.9 25.08,29.53 | 25.08,54.93 IC7.9 | 25.08,29.53 25.08,54.93 | IC8.9 25.08,80.33 25.08,54.93 | IC1.9 63.18,7.3 63.18,29.53 | IC3.9 63.18,29.53 | 63.18,54.93 IC6.9 | 63.18,29.53 63.18,54.93 | IC1-4.22 58.74,94.3 61.28,94.3 | 61.28,94.3 61.28,73.98 63.18,72.07 63.18,54.93 | 61.28,94.3 v73.66,106.68
CADDR2  (via drill 0.33)  (2 unrouted)
  Top 0.152: v64.14,102.55 78.42,102.55 | IC2.8 23.18,4.76 58.1,4.76 IC1.8
  Bottom 0.152: IC2.8 22.54,7.3 22.54,29.53 | IC4.8 22.54,29.53 | 22.54,54.93 IC7.8 | 22.54,29.53 22.54,54.93 | IC8.8 22.54,80.33 22.54,54.93 | IC1.8 60.64,7.3 60.64,29.53 IC3.8 60.64,31.43 60.64,56.83 | 60.64,56.83 60.64,86.04 55.88,90.81 55.88,91.44 IC1-4.23 54.61,93.03 v64.14,102.55 | IC6.8 60.64,56.83
CADDR3  (via drill 0.33)  (2 unrouted)
  Top 0.152: v78.11,97.47 74.93,94.3 53.66,94.3 IC1-4.24 | IC4.7 20.64,32.07 55.56,32.07 IC3.7
  Bottom 0.152: IC2.7 20,7.3 20,29.53 | IC4.7 20,29.53 | 20,54.93 IC7.7 | 20,29.53 20,54.93 | IC8.7 20,80.33 20,54.93 | IC1.7 58.1,7.3 58.1,29.53 IC3.7 58.1,31.43 58.1,56.83 | IC1-4.24 55.88,88.9 55.88,74.3 58.1,72.07 58.1,56.83 | IC6.7 58.1,56.83 | 82.55,104.14 78.11,104.14 v78.11,97.47
CADDR4  (via drill 0.33)  (2 unrouted)
  Top 0.152: v58.1,100.65 79.06,100.65
  Bottom 0.152: 16.83,6.67 17.46,7.3 17.46,29.53 | IC4.6 17.46,29.53 | 17.46,54.93 IC7.6 | 17.46,29.53 17.46,54.93 | IC8.6 17.46,80.33 17.46,54.93 | 49.85,92.39 55.56,86.68 55.56,60.01 53.98,58.42 53.98,56.52 IC6.6 55.56,54.93 55.56,31.43 IC3.6 54.61,28.57 55.56,27.62 55.56,7.3 IC1.6 54.61,1.59 21.91,1.59 16.83,6.67 | 49.85,92.39 v58.1,100.65 | 49.85,92.39 IC1-4.25 | 16.83,6.67 IC2.6
CADDR5  (via drill 0.33)  (2 unrouted)
  Top 0.152: IC1-4.26 45.4,94.3 17.46,94.3 5.4,82.23 5.4,79.38 12.06,79.38 IC8.5 | 82.55,104.14 80.64,104.14 77.79,101.28 v55.56,101.28 | IC6.5 49.53,53.34 12.06,53.34 10.48,54.93 10.48,57.47 12.38,57.47 IC7.5
  Bottom 0.152: IC1.5 53.02,7.3 53.02,29.53 | IC3.5 53.02,29.53 | IC6.5 53.02,54.93 53.02,29.53 | IC2.5 14.92,7.3 14.92,29.53 | IC4.5 14.92,29.53 | 14.92,54.93 IC7.5 | 14.92,29.53 14.92,54.93 | IC8.5 14.92,80.33 14.92,54.93 | IC1-4.26 v55.56,101.28
CADDR6  (via drill 0.33)  (2 unrouted)
  Top 0.152: v51.75,99.38 80.33,99.38 | IC7.4 13.65,53.66 48.58,53.66 49.53,54.61 IC6.4
  Bottom 0.152: IC2.4 12.38,7.3 12.38,29.53 | IC4.4 12.38,29.53 | 12.38,54.93 IC7.4 | 12.38,29.53 12.38,54.93 | IC8.4 12.38,80.33 12.38,54.93 | IC1.4 50.48,7.3 50.48,29.53 IC3.4 50.48,31.43 50.48,56.83 | 44.77,92.39 48.58,88.58 48.58,73.98 50.48,72.07 50.48,56.83 | IC6.4 50.48,56.83 | 44.77,92.39 v51.75,99.38 | 44.77,92.39 IC1-4.27
CADDR7  (via drill 0.33)  (2 unrouted)
  Top 0.152: IC1-4.28 37.47,88.27 15.88,88.27 IC8.3 | 82.55,101.6 80.64,101.6 79.06,100.01 v49.21,100.01
  Bottom 0.152: IC1.3 47.94,7.3 47.94,23.81 46.99,24.77 IC3.3 47.94,31.43 47.94,46.67 47.62,46.99 47.62,55.24 IC6.3 47.94,56.83 47.94,86.68 IC1-4.28 v49.21,100.01 | IC2.3 9.84,7.3 9.84,29.53 | IC4.3 9.84,29.53 | 9.84,54.93 IC7.3 | 9.84,29.53 9.84,54.93 | IC8.3 9.84,80.33 9.84,54.93
CADDR8  (2 unrouted)
  Top 0.152: 80.96,98.11 13.02,98.11 IC8.25 | IC1.25 47.62,19.68 8.89,19.68 7.94,20.64 7.94,23.18 9.84,23.18 IC2.25
  Bottom 0.152: IC1.25 48.9,22.23 48.9,29.21 48.58,29.53 48.58,44.77 IC3.25 49.53,53.98 48.58,54.93 48.58,70.17 IC6.25 | IC2.25 10.48,22.54 10.48,44.77 | IC4.25 10.48,44.77 | 10.48,44.77 10.48,70.17 IC7.25 10.48,72.07 10.48,95.57 IC8.25 11.43,98.11 32.07,98.11 32.7,97.47 32.7,94.3 IC1-4.1
CADDR9  (via drill 0.33)  (2 unrouted)
  Top 0.152: 42.86,83.5 42.23,82.87 16.19,82.87 14.92,81.6 14.92,71.12 IC7.24 | 42.86,83.5 IC1-4.2 | v73.66,88.27 72.39,87 49.53,87 47.94,85.41 47.94,83.5 | 42.86,83.5 47.94,83.5 | 47.94,83.5 v49.21,82.23
  Bottom 0.152: IC1.24 51.12,22.54 51.12,44.77 | IC3.24 51.12,44.77 | 51.12,44.77 51.12,70.17 IC6.24 49.21,73.98 v49.21,82.23 | IC2.24 13.02,22.54 13.02,44.77 | IC4.24 13.02,44.77 | 13.02,70.17 IC7.24 | 13.02,44.77 13.02,70.17 | IC8.24 13.02,95.57 13.02,70.17 | 82.55,96.52 73.66,96.52 v73.66,88.27
CADDR10  (via drill 0.33)  (2 unrouted)
  Top 0.152: IC1-4.3 49.53,87.63 v56.52,87.63 57.78,88.9 74.93,88.9 v75.25,89.22 | IC4.21 20,44.13 18.73,44.13 18.1,44.77 18.1,47.62 57.78,47.62 IC3.21
  Bottom 0.152: IC2.21 20.64,22.54 20.64,44.77 | IC4.21 20.64,44.77 | 20.64,70.17 IC7.21 | 20.64,44.77 20.64,70.17 | IC8.21 20.64,95.57 20.64,70.17 | IC1.21 58.74,22.54 58.74,44.77 IC3.21 58.74,46.67 58.74,72.07 | v56.52,87.63 58.74,85.41 58.74,72.07 | IC6.21 58.74,72.07
CADDR11  (via drill 0.33)  (2 unrouted)
  Top 0.152: v67.31,69.22 55.88,69.22 54.61,70.48 IC6.23 | IC7.23 18.73,73.34 v54.61,73.34
  Bottom 0.152: IC2.23 15.56,22.54 15.56,44.77 | IC4.23 15.56,44.77 | 15.56,70.17 IC7.23 | 15.56,44.77 15.56,70.17 | IC8.23 15.56,95.57 15.56,70.17 | IC1.23 53.66,22.54 53.66,44.77 IC3.23 53.66,46.67 53.66,70.17 IC6.23 v54.61,73.34 54.61,80.01 IC1-4.4 | 82.55,93.98 80.64,93.98 80.64,93.66 74.3,87.31 74.3,86.36 73.34,85.41 73.34,83.82 67.94,78.42 67.94,72.39 68.26,72.07 68.26,70.17 v67.31,69.22
CADDR12  (via drill 0.33)  (2 unrouted)
  Top 0.152: 79.69,91.12 55.88,91.12 v53.02,88.27 52.7,87.95 v45.4,87.95 16.19,87.95 9.84,81.6 9.84,79.69 7.94,79.69 IC8.2
  Bottom 0.152: IC1.2 45.4,7.3 45.4,29.53 | IC3.2 45.4,29.53 | 45.4,29.53 45.4,54.93 IC6.2 45.4,56.83 v45.4,87.95 | IC1-4.5 53.02,86.04 v53.02,88.27 | IC2.2 7.3,7.3 7.3,29.53 | IC4.2 7.3,29.53 | 7.3,54.93 IC7.2 | 7.3,29.53 7.3,54.93 | IC8.2 7.3,80.33 7.3,54.93
CMEMSEL  (1 unrouted)
  Top 0.152: R2.2 124.14,112.08 24.45,112.08 IC8.26 | IC1.26 45.4,20 10.48,20 IC2.26
  Bottom 0.152: IC1.26 46.04,22.54 46.04,44.77 | IC3.26 46.04,44.77 | IC6.26 46.04,70.17 46.04,44.77 | IC2.26 7.94,22.54 7.94,44.77 | IC4.26 7.94,44.77 | 7.94,70.17 IC7.26 | 7.94,44.77 7.94,70.17 | IC8.26 7.94,95.57 7.94,70.17
GND  (54 unrouted)
  Top 0.152: IC1.14 76.2,5.08 82.55,5.08 | IC6.14 71.12,59.69 41.91,59.69 | IC1-4.16 IC1-4.15 78.74,96.52 | 120.33,45.4 IC1-3.10 | 120.33,45.4 120.33,46.99 IC1-3.17 | 120.33,45.4 122.87,45.4 IC1-3.15 130.81,40.64 | 120.65,10.16 IC1-2.16 123.19,12.7 | 120.65,10.16 IC1-2.10 | 120.65,10.16 IC1-2.17 | 123.19,12.7 IC1-2.15 133.35,11.43 | 123.19,12.7 IC1-0.10 | IC1-0.17 IC1-0.16 123.51,30.8 133.35,30.8 | IC8.14 60.96,81.28 IC1-4.10
  Bottom 0.152: IC1.14 75.88,7.3 75.88,29.53 IC3.14 74.93,32.38 73.98,33.34 73.98,46.67 74.3,46.99 74.3,55.24 IC6.14 | 39.37,58.42 IC7.14 38.42,54.29 38.42,37.78 | IC8.14 35.88,80.33 35.88,65.72 | 39.37,8.89 IC2.14 | 39.37,33.02 38.42,32.07 | 38.42,32.07 IC4.14 | 38.42,32.07 38.42,13.65 | IC1-4.16 IC1-4.10 | IC1-1.10 113.35,53.66 113.35,40.32 IC1-3.10 | IC1-1.17 120.33,61.28 120.33,47.94 IC1-3.17
H/L-SWAP  (2 unrouted)
I/D-REG-DN  (2 unrouted)
I/D-REG-LD  (2 unrouted)
I/D-REG-RD  (2 unrouted)
I/D-REG-UP  (2 unrouted)
I/O-ADDR  (2 unrouted)
I/O-RD  (2 unrouted)
I/O-WR  (2 unrouted)
IN  (2 unrouted)
INT  (2 unrouted)
INTA  (2 unrouted)
MEM-RD  (2 unrouted)
MEM-WR  (2 unrouted)
N$1  (1 unrouted)
N$6  (2 unrouted)
N$7  (2 unrouted)
N$8  (1 unrouted)
N$10  (1 unrouted)
N$17  (1 unrouted)
N$20  (1 unrouted)
N$21  (1 unrouted)
N$22  (1 unrouted)
N$23  (1 unrouted)
N$24  (1 unrouted)
N$25  (1 unrouted)
N$26  (1 unrouted)
N$27  (1 unrouted)
N$28  (1 unrouted)
N$29  (1 unrouted)
N$30  (1 unrouted)
N$31  (1 unrouted)
N$32  (1 unrouted)
N$33  (1 unrouted)
N$34  (1 unrouted)
N$39  (2 unrouted)
OUT  (2 unrouted)
REG-BRD-LD-ID0  (2 unrouted)
REG-BRD-LD-ID1  (2 unrouted)
REG-BRD-RD-ID0  (2 unrouted)
REG-BRD-RD-ID1  (2 unrouted)
REG-FUNC  (2 unrouted)
REG-LD-HI  (2 unrouted)
REG-LD-ID0  (2 unrouted)
REG-LD-ID1  (2 unrouted)
REG-LD-LO  (2 unrouted)
REG-RD-HI  (2 unrouted)
REG-RD-ID0  (2 unrouted)
REG-RD-ID1  (2 unrouted)
REG-RD-LO  (2 unrouted)
RESET  (2 unrouted)
SCL  (9 unrouted)
  Top 0.152: IC1-4.12 73.66,81.28 118.11,81.28
  Bottom 0.152: IC1-2.12 118.43,4.76 118.43,20.64 | IC1-0.12 118.43,20.64 | 118.43,38.42 IC1-3.12 | 118.43,20.64 118.43,38.42 | 118.43,38.42 118.43,53.66 IC1-1.12 117.79,56.2 117.79,89.85 | 117.79,89.85 117.79,90.49 | 117.79,89.85 119.06,88.58 120.97,88.58 120.97,84.14
SDA  (9 unrouted)
  Top 0.152: IC1-4.13 73.98,83.5 78.11,83.5 80.96,86.36 97.16,86.36 99.38,84.14 101.28,84.14 106.36,89.22 | 106.36,97.79 106.36,89.22 | 106.36,89.22 125.41,89.22
  Bottom 0.152: IC1-2.13 120.97,4.76 120.97,20.64 | IC1-0.13 120.97,20.64 | 120.97,38.42 IC1-3.13 | 120.97,20.64 120.97,38.42 | IC1-1.13 120.97,53.66 120.97,45.4 | 120.97,38.42 120.97,45.4 | 125.73,45.4 120.97,45.4
SP/PC-ADDR-RD  (2 unrouted)
SP/PC-DATA-RD-HI  (2 unrouted)
SP/PC-DATA-RD-LO  (2 unrouted)
SP/PC-DN  (2 unrouted)
SP/PC-LD-HI  (2 unrouted)
SP/PC-LD-LO  (2 unrouted)
SP/PC-SEL  (2 unrouted)
SP/PC-UP  (2 unrouted)
SR-LD  (2 unrouted)
UNUSED1  (2 unrouted)
UNUSED2  (2 unrouted)
VCC  (via drill 0.33)  (48 unrouted)
  Top 0.152: 3.81,15.24 IC2.28 | 92.71,88.9 75.88,88.9 73.66,86.68 63.82,86.68 IC1-4.9 58.74,81.6 42.23,81.6 v41.91,81.92 | IC1-3.16 115.89,53.02 113.35,53.02 IC1-1.9 | IC1-0.15 118.43,23.18 113.35,23.18 IC1-0.9 | IC1-1.16 IC1-1.15 135.89,62.23 | SV1.1 82.55,111.76 114.3,111.76 R2.1
  Bottom 0.152: 39.37,19.05 40.32,20 | 40.32,20 IC1.28 42.86,22.54 42.86,44.77 | 42.86,44.77 IC3.28 | 42.86,44.77 42.86,56.83 42.55,57.15 42.55,70.48 IC6.28 v41.91,81.92 | 40.32,20 40.32,38.42 40.32,63.82 | 1.27,43.18 2.86,44.77 | 2.86,44.77 IC4.28 | 2.86,70.17 IC7.28 | 2.86,44.77 2.86,70.17 | IC8.28 2.86,95.57 2.86,70.17 | IC2.28 2.54,22.86 2.54,38.1 | IC1-4.9 IC1-4.17 72.39,95.25 72.39,101.6 SV1.1 | IC1-2.9 110.81,4.76 110.81,20.64 | IC1-0.9 110.81,20.64 | 110.81,38.42 IC1-3.9 | 110.81,20.64 110.81,38.42 | IC1-1.9 110.81,53.66 110.81,38.42 | 120.65,105.41 R2.1 | 121.92,72.39 IC1-1.16 122.87,61.28 122.87,47.94 IC1-3.16